# Altium PCB UI_PCB.PcbDoc
Units mm, origin at the board's own origin, x right, y up, seen from the top; angles counter-clockwise.
Board outline 93.68 x 79.71 mm, 4 copper layers (Top Layer, GND, PWR, Bottom Layer), stack 1.586 mm thick; 24 components, 36 nets, 164 pads, 236 vias.
Unrouted connection lines stored in the file: 28.
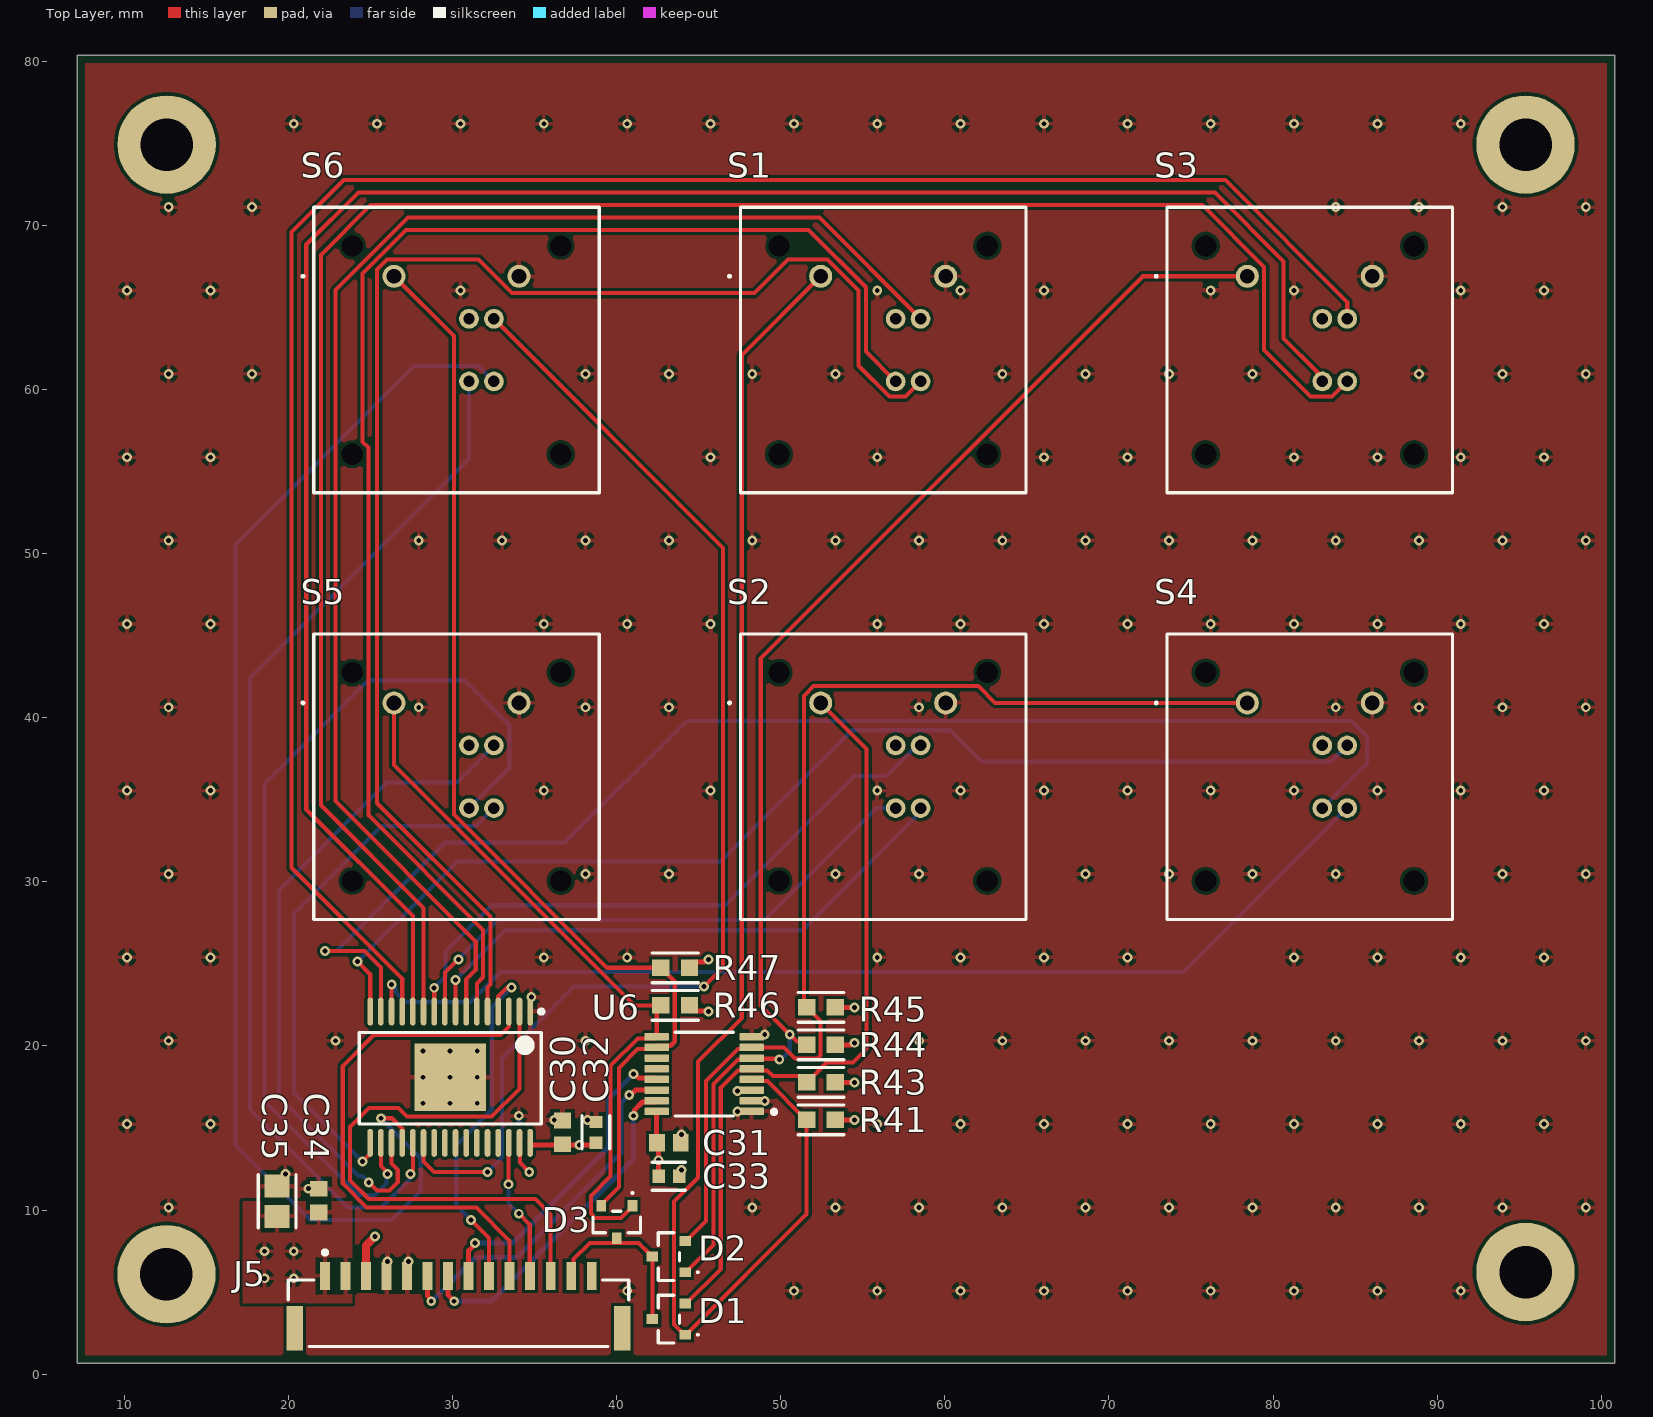
[diagram p0: Top Layer view]
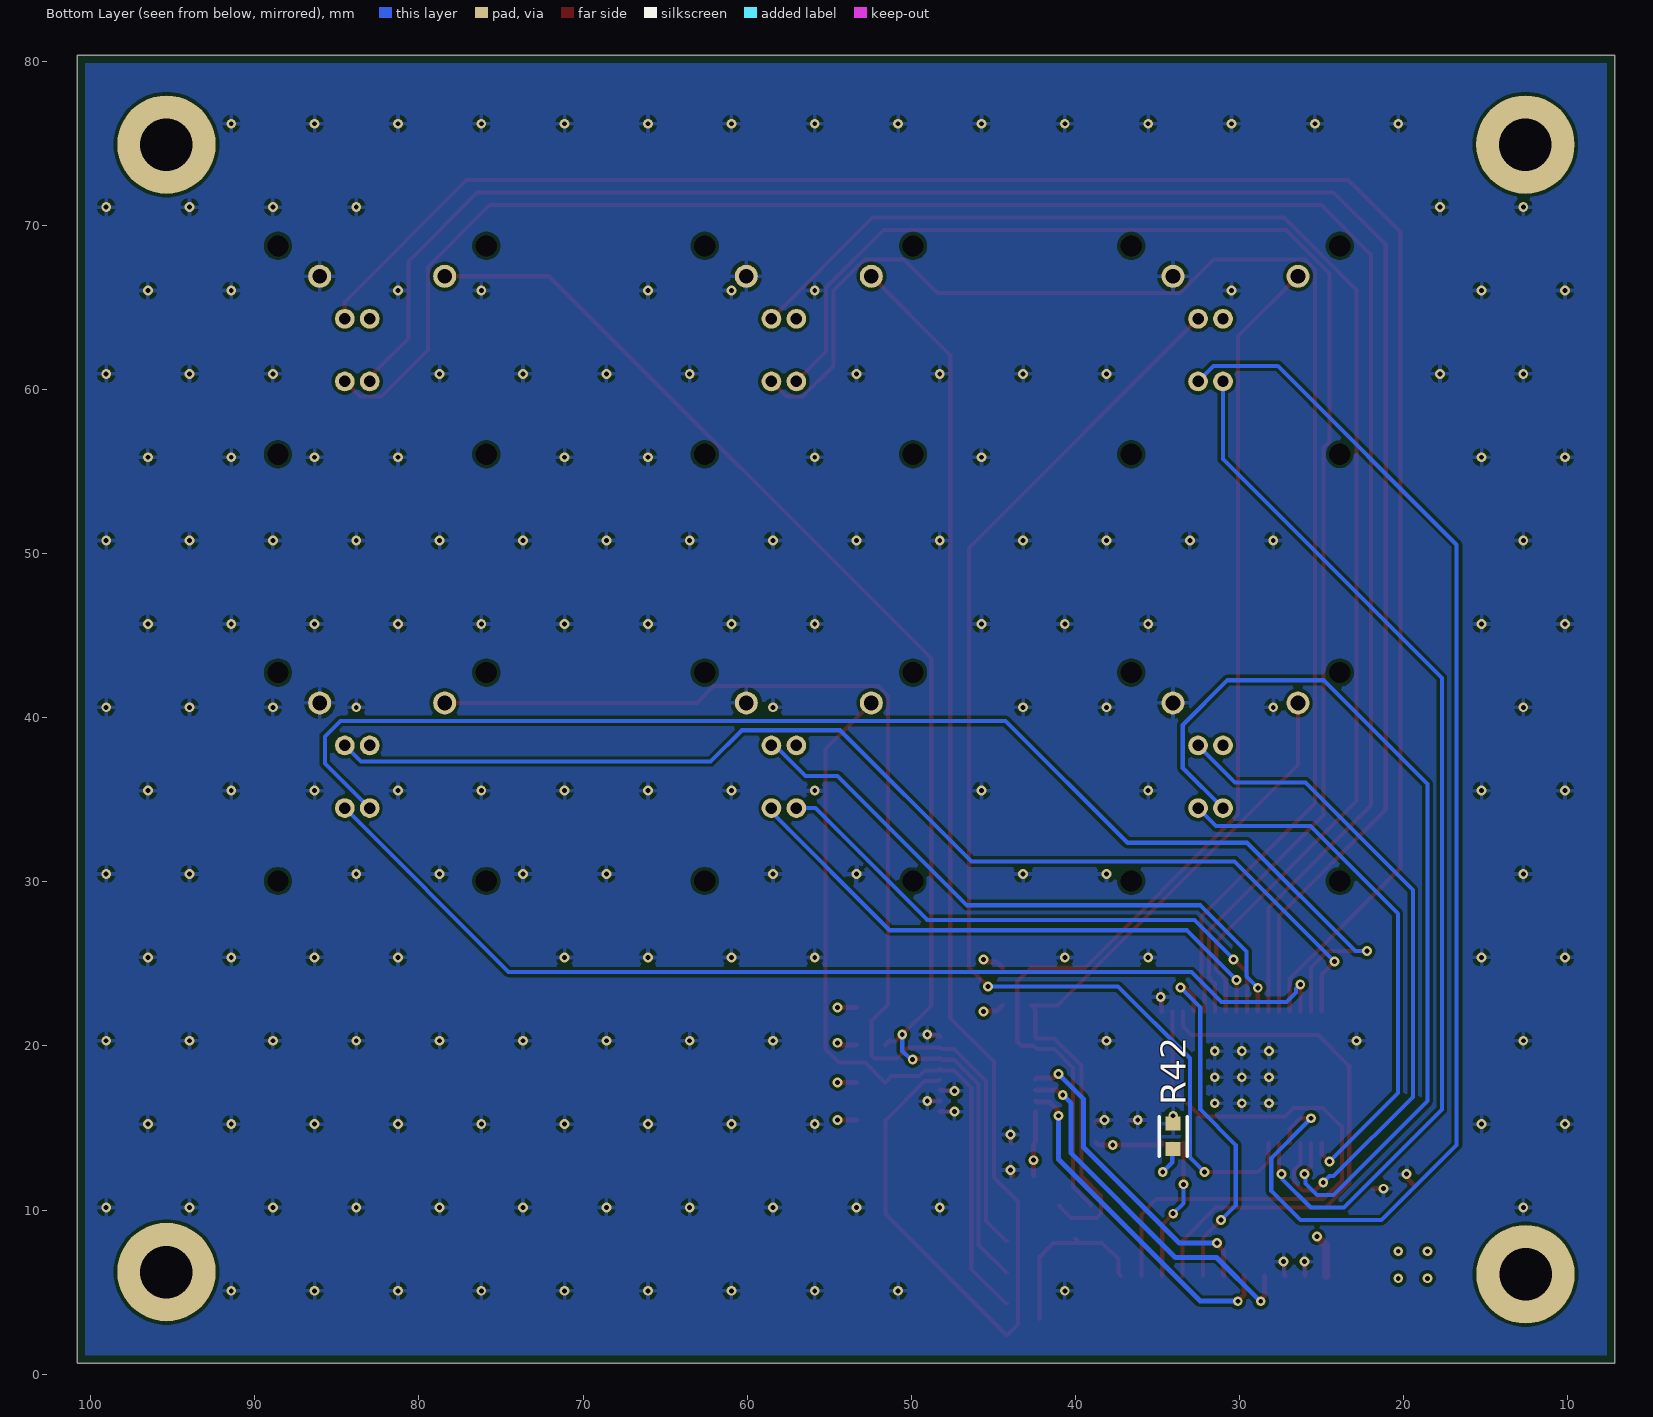
[diagram p1: Bottom Layer view, seen from below]
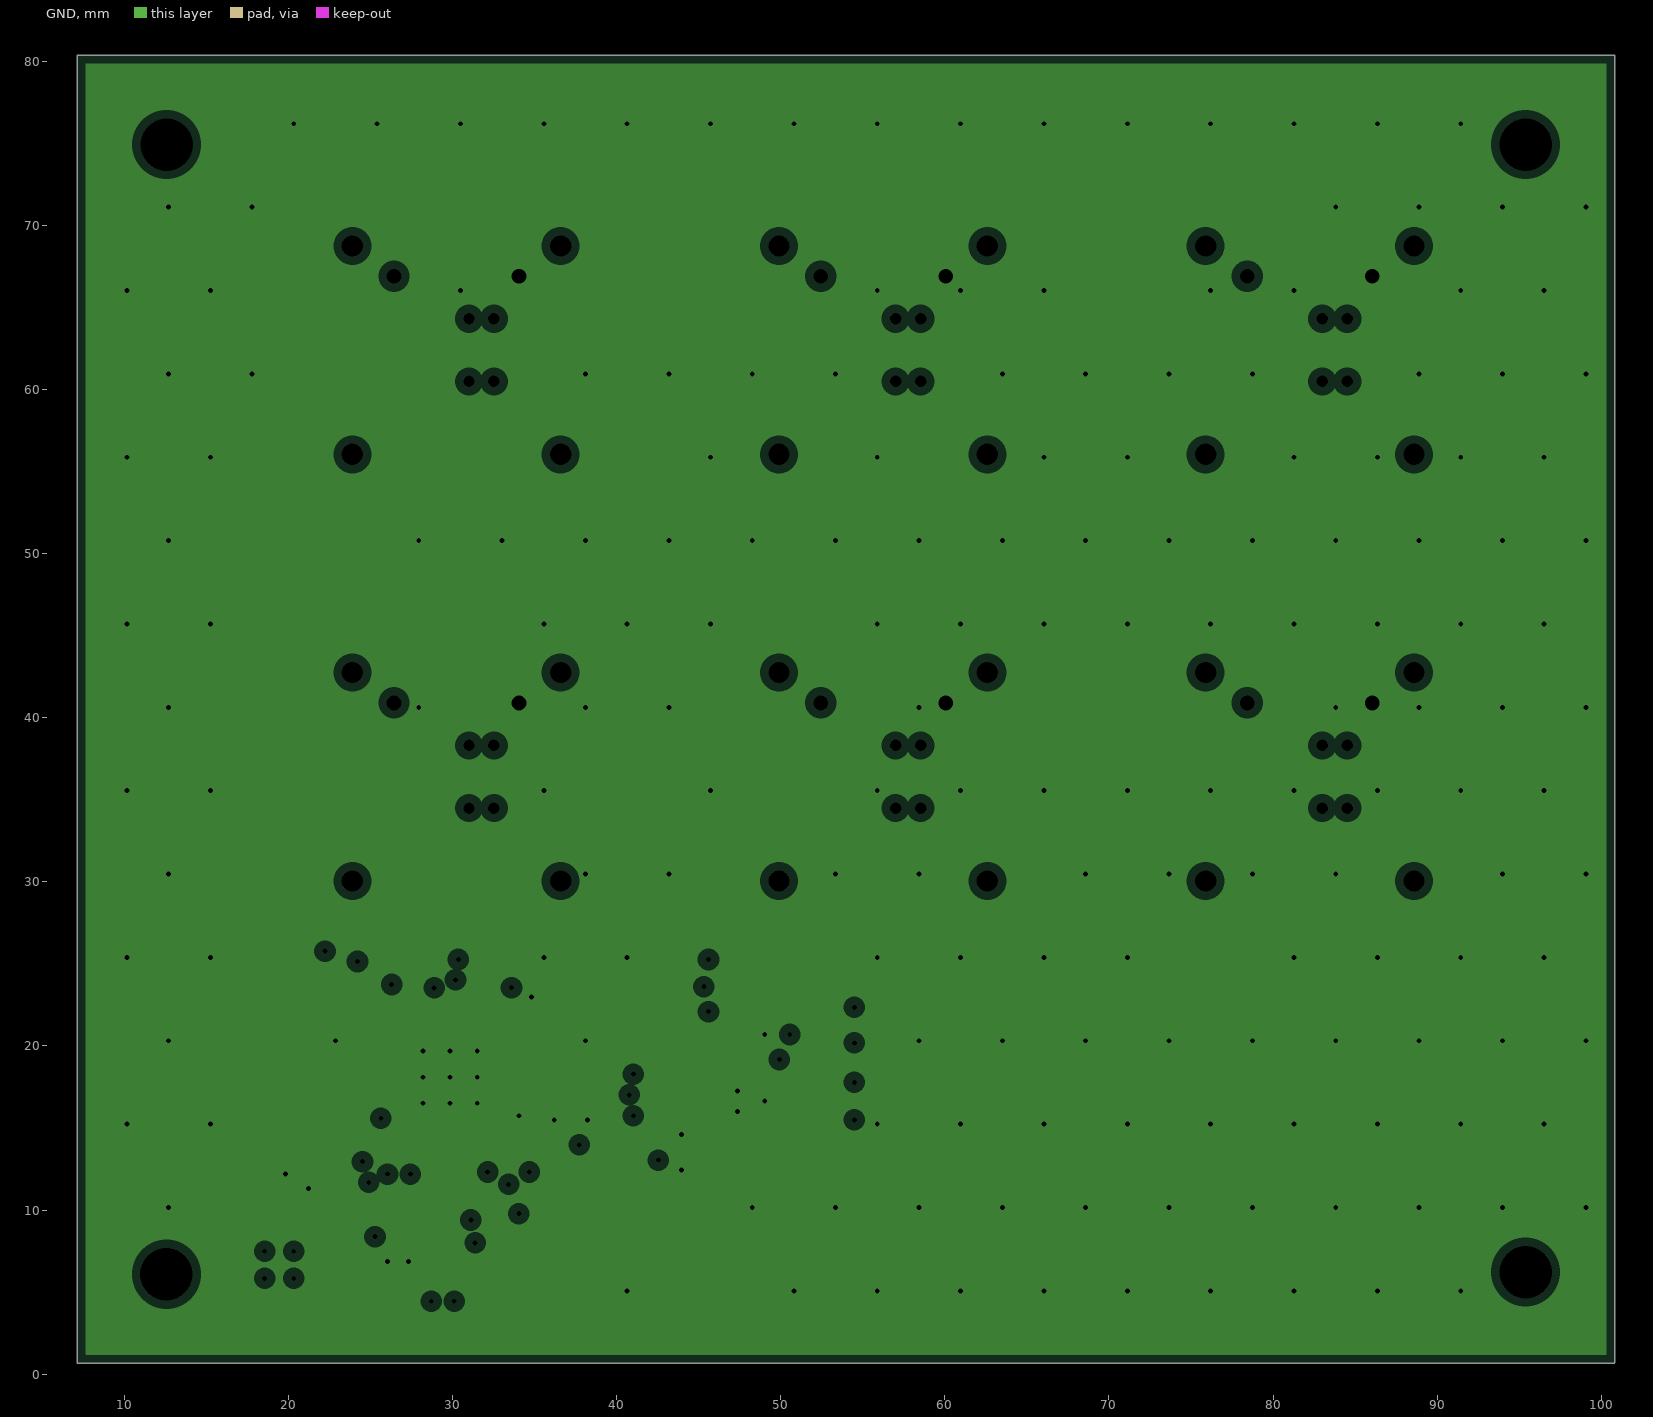
[diagram p2: GND, clearances drawn from the general rule]
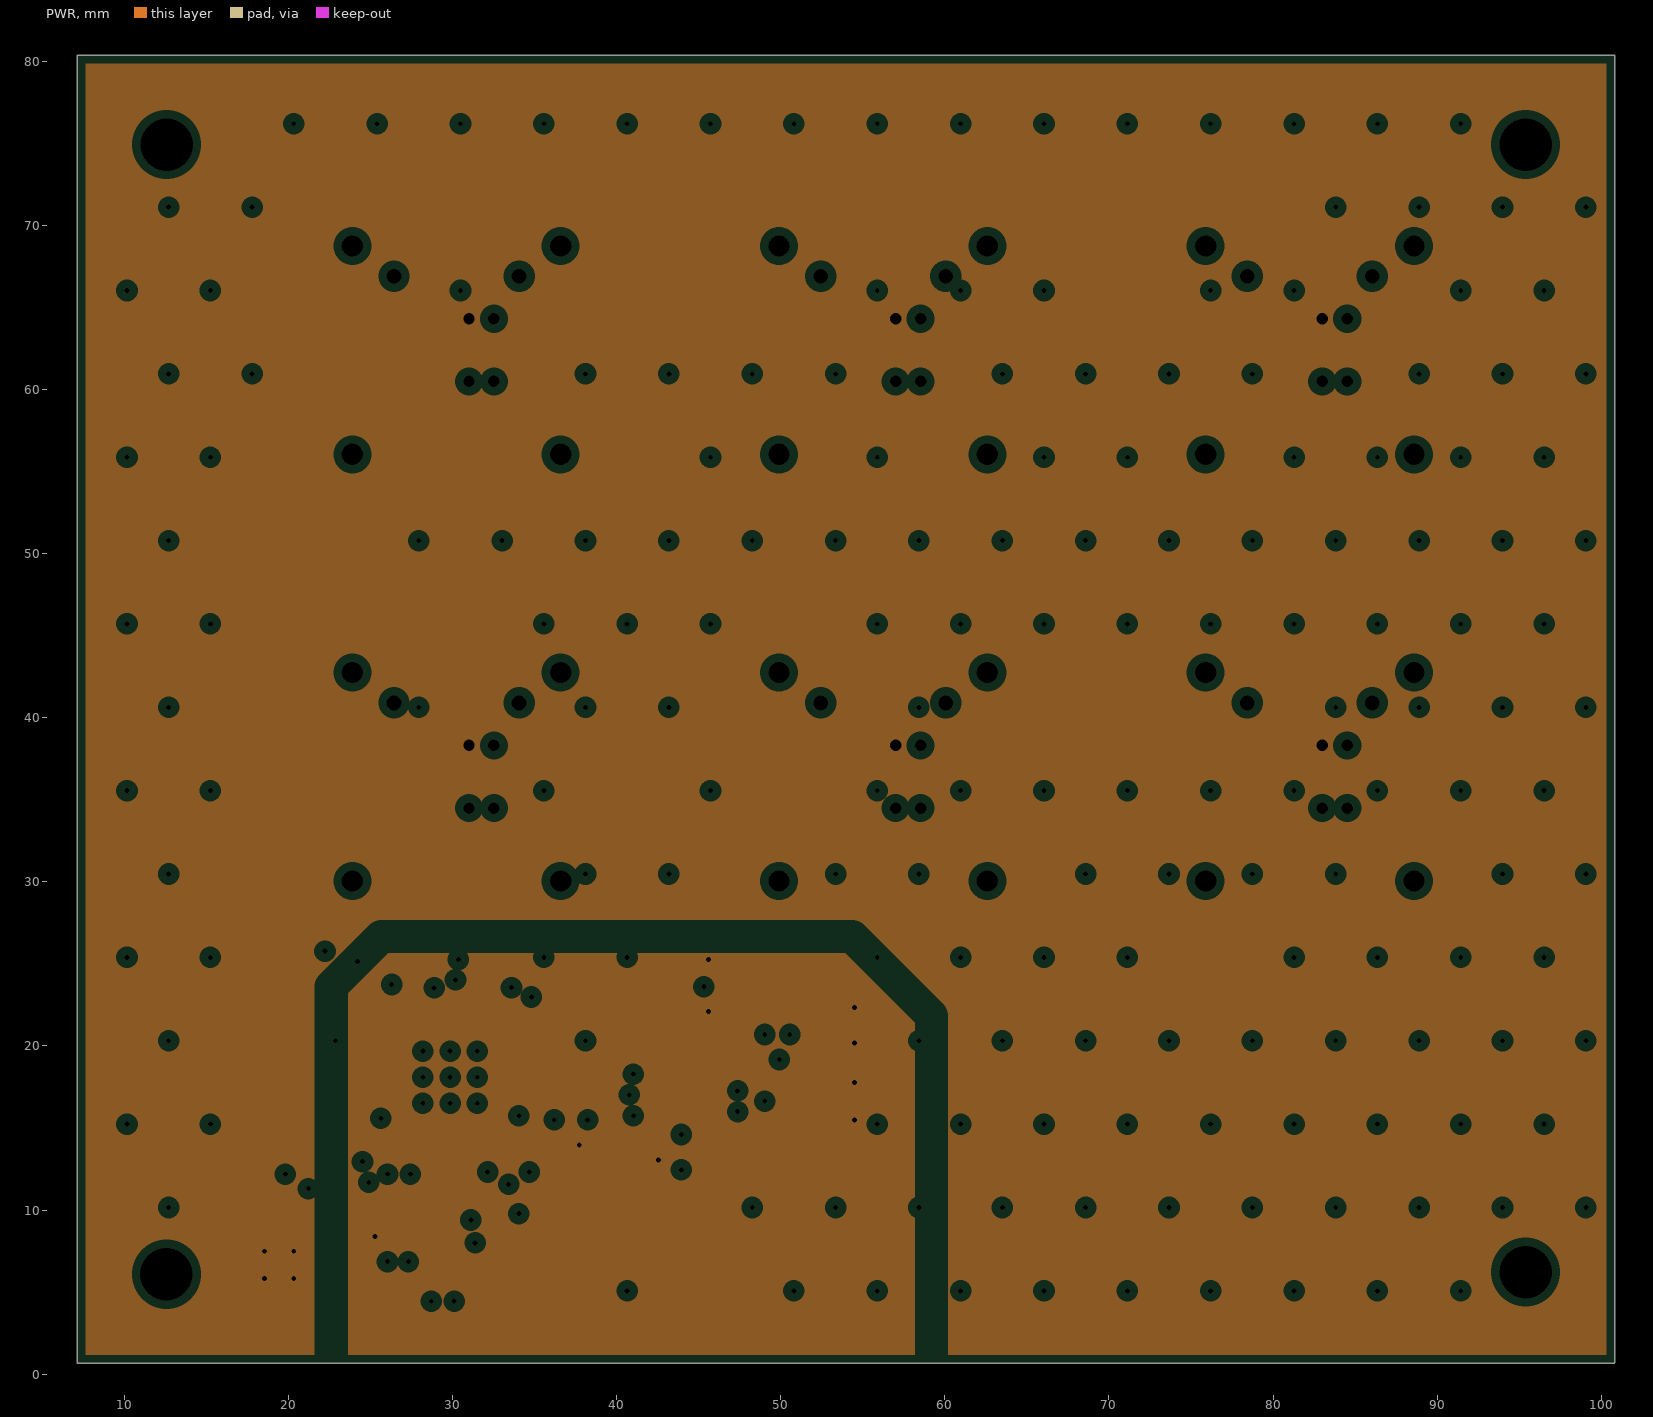
[diagram p3: PWR, clearances drawn from the general rule]
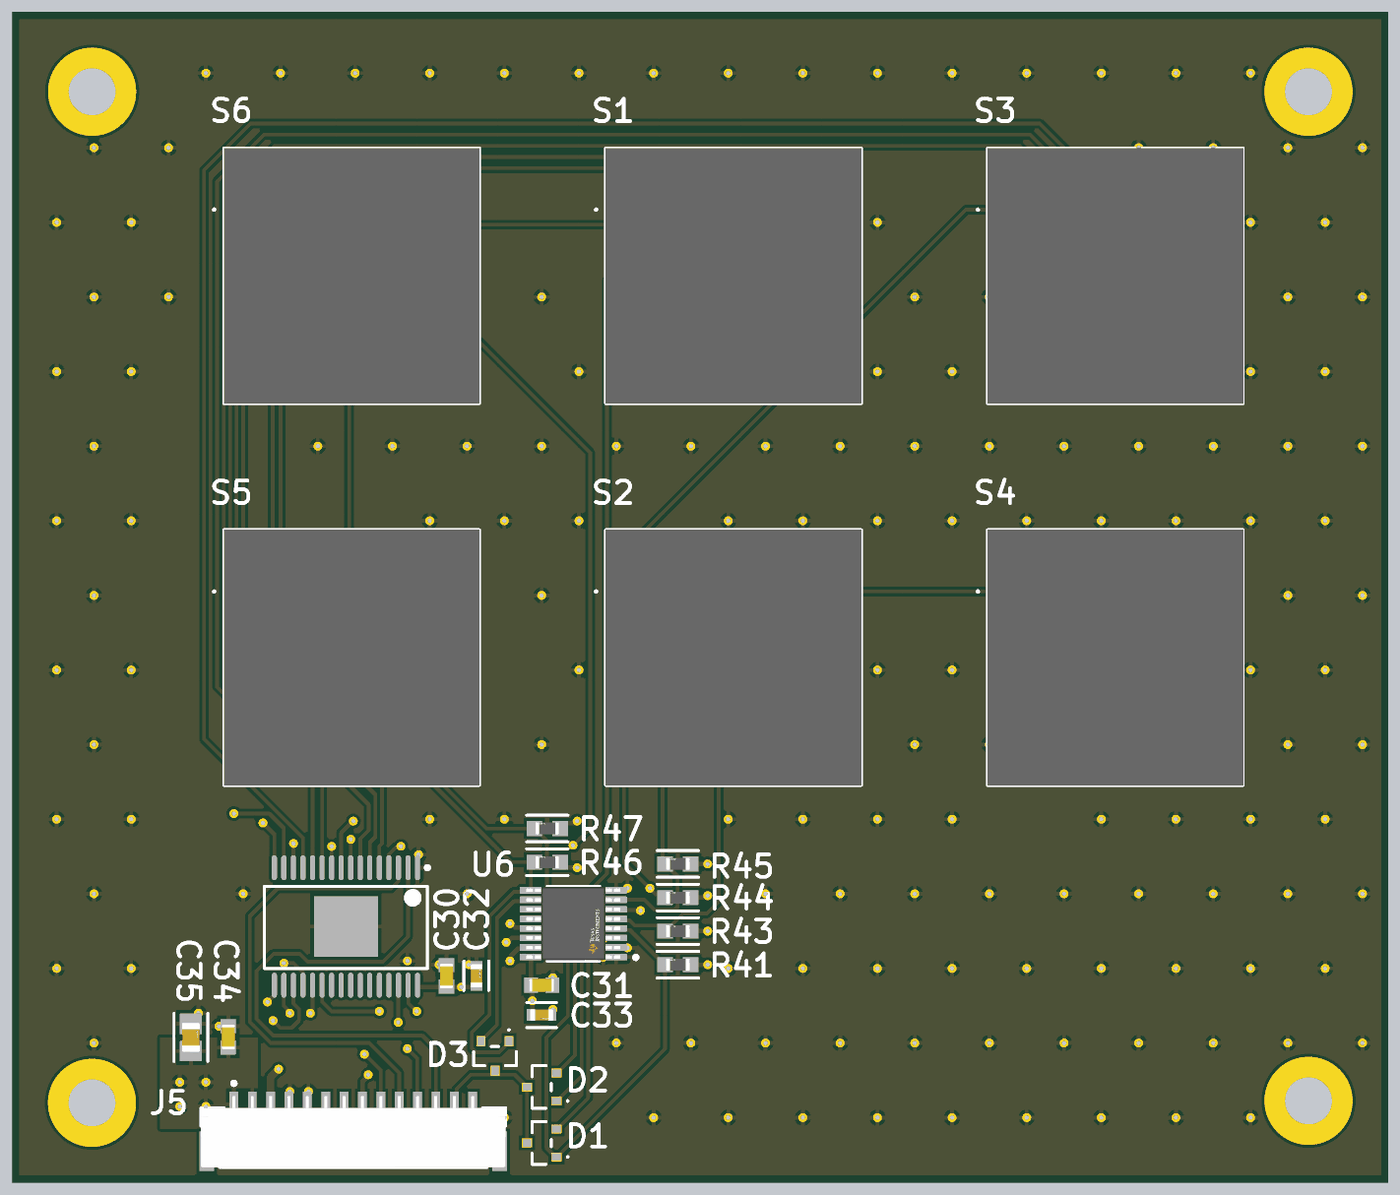
[diagram p4: 3D render of the assembled board from above, using the file's embedded part models]

## Layer stack, top to bottom
Top Solder: solder mask 0.0254, Solder Resist, Dk 4
Top Layer: signal copper 0.035
Dielectric 2: prepreg 0.2104, PP-006, Dk 4.3
GND: plane copper 0.0152, net GND
Dielectric 3: core 1.065, Core-039, Dk 4.8
PWR: plane copper 0.0152, net VLED_5V
Dielectric 1: dielectric 0.2104, FR-4, Dk 4.3
Bottom Layer: signal copper 0.035
Bottom Solder: solder mask 0.0254, Solder Resist, Dk 4

## Board outline
7.135,0.658 7.135,80.368 100.815,80.368 100.815,0.684 100.789,0.658

## Design rules (kind name [scope] priority, off if disabled: settings)
Clearance [All] p1: gap=0.2 ignorepadtopadclearanceinfootprint=FALSE
HoleSize [All] p1: absolutevalues=TRUE maxlimit=10 minlimit=0.025 maxpercent=80.000 minpercent=20.000
MinimumSolderMaskSliver [All] p1: minsoldermaskwidth=0.1
PlaneClearance [All] p1: clearance=0.508
PlaneConnect [All] p1: planeconnectstyle=Relief reliefexpansion=0.508 reliefentries=4 reliefconductorwidth=0.254 reliefairgap=0.254
PolygonConnect [All] p1: connectstyle=Relief reliefconductorwidth=0.254 reliefentries=4 polygonreliefangle="90 Angle" airgapwidth=0.254
RoutingVias [All] p1: holewidth=0.3 width=0.6 viastyle="Through Hole" minholewidth=0.3 minwidth=0.6 maxholewidth=0.3 maxwidth=0.6
SilkToSilkClearance [All] p1: silktosilkclearance=0.15
SilkToSolderMaskClearance [IsPad] p1: minsilkscreentomaskgap=0.15 clearancetoexposedcopper=TRUE
SolderMaskExpansion [All] p1: expansion=0 istentingtop=FALSE
SupplyNets "Schematic Supply Nets" [InNet('GND')] p1: voltage=0.000
Width Width_2 [InNet('VLED_5V')] p1: maxlimit=0.8 minlimit=0.5 preferedwidth=0.7
Width Width_1 [InNet('SYS_3V3')] p2: maxlimit=0.5 minlimit=0.3 preferedwidth=0.4
Width [All] p3: maxlimit=0.3 minlimit=0.2 preferedwidth=0.25 minimp=50.000000 maximp=50.000000 favimp=50.000000
24 further rules are at their usual default settings.

## Components (designator, comment, footprint, x,y, rotation, side; value= is the part's Value field where it differs from the comment)
C30 "100nF" CAPC1608X90X35ML10T15 36.703,14.732 r270 top
C31 "100nF" CAPC1608X90X35ML10T15 43.18,14.097 r180 top
C32 "1uF" FP-GRT188-0_1-e0_2_0_5-IPC_C 38.735,14.74 r90 top
C33 "1uF" FP-GRT188-0_1-e0_2_0_5-IPC_C 43.18,12.065 r0 top
C34 "100nF" CAPC1608X90X35ML10T15 21.845,10.578 r270 top
C35 "10uF" FP-GRM21B-0_15-IPC_A 19.304,10.541 r90 top
D1 "BAT54A" NXP-SOT23-3_V 43.18,3.353 r270 top
D2 "BAT54A" NXP-SOT23-3_V 43.18,7.163 r270 top
D3 "BAT54A" NXP-SOT23-3_V 40.005,9.271 r0 top
J5 "SM14B-GHS-TB(LF)(SN)" FP-SM14B-GHS-TB_LF_SN-MFG 30.353,3.714 r0 top
R41 "10kR" FP-AC0603-IPC_A 52.451,15.494 r180 top
R42 "5.1kR" FP-AT0603-IPC_B 34.036,14.493 r270 bottom
R43 "10kR" FP-AC0603-IPC_A 52.451,17.78 r180 top
R44 "10kR" FP-AC0603-IPC_A 52.451,20.066 r180 top
R45 "10kR" FP-AC0603-IPC_A 52.451,22.352 r180 top
R46 "10kR" FP-AC0603-IPC_A 43.561,22.479 r180 top
R47 "10kR" FP-AC0603-IPC_A 43.561,24.765 r180 top
S1 "KP0115ANBKG03RGBP-3SJB" KP0115ANBKG03RGBP3SJB 52.43,66.907 r0 top locked
S2 "KP0115ANBKG03RGBP-3SJB" KP0115ANBKG03RGBP3SJB 52.43,40.907 r0 top locked
S3 "KP0115ANBKG03RGBP-3SJB" KP0115ANBKG03RGBP3SJB 78.43,66.907 r0 top locked
S4 "KP0115ANBKG03RGBP-3SJB" KP0115ANBKG03RGBP3SJB 78.43,40.907 r0 top locked
S5 "KP0115ANBKG03RGBP-3SJB" KP0115ANBKG03RGBP3SJB 26.43,40.907 r0 top locked
S6 "KP0115ANBKG03RGBP-3SJB" KP0115ANBKG03RGBP3SJB 26.43,66.907 r0 top locked
U6 "TCA9534APWR" FP-PW0016A-MFG 45.339,18.288 r180 top

## Footprints (in the part's own frame and the unit in brackets; to place one, negate y for a bottom-side part, rotate by r counter-clockwise, add the part's x,y. Pads: shape width x height; smd on the part's side, far side on the other; paste and mask are expansions set on the pad)
CAPC1608X90X35ML10T15 [mm] "Chip Capacitor, 2-Leads, Body 1.7x0.9mm, IPC Low Density"
  rect 0.95x1.05 smd: 1(-0.725,0) 2(0.725,0)
  body extent -0.85,-0.45 0.85,0.45, height 0.9
FP-AC0603-IPC_A [mm]
  rect 1.059x1.012 smd paste+0 mask+0: 1(-0.877,0) 2(0.877,0)
  silkscreen extent -1.41,-0.91 1.41,0.91, body extent -1.91,-1.01 1.91,1.01, height 0.25
FP-AT0603-IPC_B [mm]
  rect 0.859x0.912 smd paste+0 mask+0: 1(-0.777,0) 2(0.777,0)
  silkscreen extent -1.21,-0.86 1.21,0.86, body extent -0.8,-0.4 0.8,0.4, height 0.55
FP-GRM21B-0_15-IPC_A [mm]
  rect 1.406x1.508 smd paste+0 mask+0: 1(-0.926,0) 2(0.926,0)
  silkscreen extent -1.63,-1.15 1.63,1.15, body extent -2.13,-1.25 2.13,1.25, height 0.25
FP-GRT188-0_1-e0_2_0_5-IPC_C [mm]
  rect 0.759x0.812 smd paste+0 mask+0: 1(-0.627,0) 2(0.627,0)
  silkscreen extent -1.01,-0.85 1.01,0.85, body extent -1.11,-0.55 1.11,0.55, height 0.25
FP-PW0016A-MFG [mm]
  rrect22% 1.5x0.45 smd paste+0 mask+0: 1(-2.9,2.275) 2(-2.9,1.625) 3(-2.9,0.975) 4(-2.9,0.325) 5(-2.9,-0.325) 6(-2.9,-0.975) 7(-2.9,-1.625) 8(-2.9,-2.275) 9(2.9,-2.275) 10(2.9,-1.625) 11(2.9,-0.975) 12(2.9,-0.325) 13(2.9,0.325) 14(2.9,0.975) 15(2.9,1.625) 16(2.9,2.275)
  silkscreen extent -4.38,-2.55 1.78,2.55, body extent -3.75,-2.8 3.75,2.8, height 0.25
FP-SM14B-GHS-TB_LF_SN-MFG [mm]
  rect 0.6x1.7 smd paste+0 mask+0: 1(-8.125,2.275) 2(-6.875,2.275) 3(-5.625,2.275) 4(-4.375,2.275) 5(-3.125,2.275) 6(-1.875,2.275) 7(-0.625,2.275) 8(0.625,2.275) 9(1.875,2.275) 10(3.125,2.275) 11(4.375,2.275) 12(5.625,2.275) 13(6.875,2.275) 14(8.125,2.275)
  rect 1x2.7 smd paste+0 mask+0: 15(-9.975,-0.925) 16(9.975,-0.925)
  silkscreen extent -10.37,-2.02 10.37,3.82, body extent -10.58,-2.37 10.58,3.22, height 0.25
KP0115ANBKG03RGBP3SJB [mm]
  round 1.4 hole 0.9: 1(0,0) A1(7.62,0)
  round 1.2 hole 0.7: 2(4.57,-2.59) 3(6.09,-2.59) 4(6.09,-6.41) 5(4.57,-6.41)
  round 0.65 hole 1.3 unplated: MH1(-2.54,-10.85) MH2(-2.54,1.85) MH3(10.16,1.85) MH4(10.16,-10.85)
  silkscreen extent -5.6,-13.2 12.51,4.2, body extent -4.89,-13.2 12.51,4.2, height 23.1
NXP-SOT23-3_V [mm] "SOT23, 3-Leads, Body 1.3x2.9mm, Pitch 0.95mm"
  rect 0.6x0.7 smd paste-0.05: 1(0.95,1) 2(-0.95,1) 3(0,-1)
  silkscreen extent -1.45,-0.65 1.45,1.79, body extent -1.45,-0.65 1.45,0.65, height 1.1

## Part data
C30 C31 C34: library part CMP-2006-02375-5, "Chip Capacitor, 100 nF, +/- 10%, 50 V, -55 to 125 degC, 0603 (1608 Metric), RoHS, Tape and Reel", Manufacturer=Murata, Max Operating Temperature="125 degC", Min Operating Temperature="-55 degC", Package Quantity=4000, Voltage Rating="50 V", ComponentLink1Description="Manufacturer URL", ComponentLink1URL=http://www.murata.com/, ComponentLink2Description=Datasheet, ComponentLink2URL=http://psearch.en.murata.com/capacitor/product/GCM188R71H104KA57%23.pdf, DatasheetVersion=07/2016, Height="0.8 mm", Length="1.6 mm", Mount="Surface Mount", Mounting Technology="Surface Mount", PackageDescription="2-Pin Surface Mount Device, Body 1.6 x 0.8 mm", PackageReference=0603, Packaging="Tape and Reel", REACH SVHC="No SVHC", RoHSCompliant=true
C32 C33: library part CMP-06035-050353-1, "Multi-Layer Ceramic Capacitor 1uF 25V X7R ±10% 0603 Paper T/R"
C35: library part CMP-06035-013048-1, "Chip Multilayer Ceramic Capacitors for General Purpose, 0805, 10uF, X5R, 15%, 20%, 25V", Case Code (Imperial)=0805, Case Code (Metric)=2012, Dielectric=X5R, Max Operating Temperature=85°C, Min Operating Temperature=-55°C, Package Quantity=3000, Resistor Type=Ceramic, Tolerance=20%, Voltage Rating=25V, Capacitance=10uF, Case/Package=0805, Depth=1.25mm, Height=1.25mm, Lead Free="Lead Free", Length=2mm, Mount="Surface Mount", Packaging="Tape and Reel", REACH SVHC="No SVHC", Termination=SMD/SMT, Thickness=0.055inch, Voltage Rating (DC)=25V, Weight=0.000335oz, Width=0.049inch
D1 D2 D3: library part CMP-0417-00002-1, "Schottky Barrier Diode, 30 V, 2 uA, -55 to 150 degC, 3-Pin SOT23, RoHS, Tape and Reel", Manufacturer="NXP Semiconductors", Temperature Range="-55 to 150 degC", Cd (pF)=10, ComponentLink1Description="Manufacturer URL", ComponentLink1URL=http://www.nxp.com/, ComponentLink2Description=Datasheet, ComponentLink2URL=http://www.nxp.com/documents/data_sheet/BAT54_SER.pdf, DatasheetVersion="Rev. 5", IR (uA)=2, Mounting Technology="Surface Mount", PackageDescription="3-Pin Plastic Surface-mounted Package, Body 1.3 x 2.9 mm, Pitch 0.95 mm", PackageReference=SOT23-3, Packing="Tape and Reel", PartNumber=BAT54A, RoHS=TRUE, Rth(j-a) (K/W)=500, Trr (ns)=5, VF (mV)=800, VR (V)=30
J5: library part CMP-17439-000618-1, "CONN HEADER SMD R/A 14POS 1.25MM", Color=Natural, Current Rating=1A, Flammability Rating="UL94 V-0", Max Operating Temperature=85°C, Min Operating Temperature=-25°C, Package Quantity=2500, Voltage Rating=50V, Connector Type=Header, Contact Finish - Mating=TIN, Contact Material=Bronze, Contact Plating=Tin, Contact Shape=Rectangular, Contact Type="Outer Shroud Contact", Fastening Type=Ramp, Gender=Male, Housing Color=Natural, Housing Material=Nylon, Insulation Color=Natural, Insulation Material=Nylon, Lead Free="Lead Free", Mount="Surface Mount", Number Of Contacts=14, Number of Positions=14, Number of Rows=1, Packaging="Cut Tape", Pitch=1.25mm, Reach SVHC Compliant=Yes, Series=GH, Termination=Solder, Voltage Rating (AC)=50V, Wire/Cable Gauge=26AWG
R41 R43 R44 R45 R46 R47: library part CMP-03412-040683-1, "RES 10kΩ 5.00% 0.2W 0603"
R42: library part CMP-03412-047308-1, "Thin Film Chip Resistors Automotive Grade 5.1kΩ 1% 50ppm/°C 0603"
S1 S2 S3 S4 S5 S6: "Switch", Manufacturer_Name="NKK Switches", Mouser Part Number=633-5ANBKG03RGBP3SJB, Datasheet Link=https://www.nkkswitches.com/wp-content/themes/impress-blank/search/inc/parts.php?part_no=KP0115ANBKG03RGBP-3FJB, Height=23mm, Manufacturer_Part_Number=KP0115ANBKG03RGBP-3SJB, Mouser Price/Stock=https://www.mouser.co.uk/ProductDetail/NKK-Switches/KP0115ANBKG03RGBP-3SJB?qs=u16ybLDytRbS46rqp2jE%2Fg%3D%3D
U6: library part CMP-04886-000001-1, "IC I/O EXPANDER I2C 8B 16TSSOP", Ambient Temperature Range High=+85°C, Ambient Temperature Range Low=-40°C, Frequency=400kHz, Manufacturer="Texas Instruments", Max Junction Temp=100°C, Max Supply Voltage=5.5V, Min Supply Voltage=1.65V, Nominal Supply Current=5-22uA, Package=PW0016A, Temperature="-40°C to +85°C", Automotive=No, Category=IC, ComponentLink2Description=Datasheet, ComponentLink2URL=http://www.ti.com/lit/ds/symlink/tca9534a.pdf, Device Class L1="Integrated Circuits (ICs)", Device Class L2="Interface ICs", Device Class L3="I/O Expanders", Digikey Description="IC I/O EXPANDER I2C 8B 16TSSOP", Height=1.2mm, Interface=I2C,SMBus, Lead Free=Yes, Manufacturer Part Number=TCA9534APWR, Number Of I/Os=8, Octopart=https://octopart.com/tca9534apwr-texas+instruments-50333529, RoHS=TRUE, Standoff Height=0.05mm, Temperature Range High=+85°C, Temperature Range Low=-40°C

## Free pads (board coordinates)
  oval 0.35x1.7 smd: 1(34.73,22.097) 2(34.08,22.097) 3(33.43,22.097) 4(32.78,22.097) 5(32.13,22.097) 6(31.48,22.097) 7(30.83,22.097) 8(30.18,22.097) 9(29.53,22.097) 10(28.88,22.097) 11(28.23,22.097) 12(27.58,22.097) 13(26.93,22.097) 14(26.28,22.097) 15(25.63,22.097) 16(24.98,22.097) 17(24.98,14.097) 18(25.63,14.097) 19(26.28,14.097) 20(26.93,14.097) 21(27.58,14.097) 22(28.23,14.097) 23(28.88,14.097) 24(29.53,14.097) 25(30.18,14.097) 26(30.83,14.097) 27(31.48,14.097) 28(32.13,14.097) 29(32.78,14.097) 30(33.43,14.097) 31(34.08,14.097) 32(34.73,14.097)
  rect 4.36x4.11 smd: 33(29.855,18.097)
  round 6 hole 3.2 unplated: MH3(12.565,6.088) MH3(12.573,74.933) MH3(95.385,6.223) MH3(95.385,74.933)

## Via types
v1: diameter 0.6, hole 0.3, Top Layer to Bottom Layer, 236 vias

## Nets (pads, with @x,y where several pads share a name; then routed paths per layer and width w, separated by ;. In a path a pad name is that pad's centre, name@x,y a point inside that pad or via, vN(x,y) a via of type N, cw(c..) or ccw(c..) an arc to the next point about the centre after c; other vN are vias at no path point)
BTN_INOUT: D3.2 R47.2 S6.1 U6.10 | length 68.6
  Top Layer w0.25: S6.1 30.075,63.262 30.075,34.114 39.424,24.765 R47.2 42.708,24.765 43.539,23.934 43.539,20.257 43.295,20.013 42.539,20.013 U6.10 42.339,19.813 41.276,19.813 40.132,18.669 40.132,11.398 39.055,10.321 D3.2
BTN_MULTI_WAKE: D1.3 D2.3 D3.3 J5.13 | length 10.8
  Top Layer w0.25: J5.13 37.38,6.141 37.38,7.018 38.363,8.001 D3.3@39.878,8.001 ; 42.18,6.198 D2.3
  Top Layer w0.254: D3.3 39.878,8.144 39.878,8.001 40.005,8.001 41.342,8.001 41.957,7.386 41.957,7.336 42.13,7.163 D2.3 ; D1.3 42.18,6.198
BTN_SHARED: D3.1 R46.2 S5.1 U6.9 | length 44.1
  Top Layer w0.25: S5.1 26.43,37.122 41.073,22.479 R46.2 42.439,22.234 U6.9 42.339,20.463 41.29,20.463 39.624,18.797 39.624,12.065 38.43,10.871 38.43,9.786 38.691,9.525 40.259,9.525 40.955,10.221 D3.1
BTN_U1: D1.1 R41.2 S1.1 U6.4 | length 89.1
  Top Layer w0.25: U6.4 48.339,17.863 49.182,17.863 51.551,15.494 R41.2 51.574,9.747 44.23,2.403 D1.1 44.13,2.403 43.505,3.028 43.505,10.518 44.958,11.971 44.958,19.05 47.625,21.717 47.625,62.102 S1.1
BTN_U2: D1.2 R43.2 S2.1 U6.5 | length 46.9
  Top Layer w0.25: D1.2 44.23,4.303 46.344,6.417 46.344,17.474 47.383,18.513 48.139,18.513 U6.5 48.339,18.513 49.01,18.513 49.168,18.513 49.52,18.161 51.193,18.161 R43.2 51.598,17.78 52.802,18.984 54.412,18.984 55.235,19.807 55.235,38.102 S2.1
BTN_U3: D2.1 R44.2 S3.1 U6.6 | length 82.8
  Top Layer w0.25: D2.1 44.23,6.213 45.894,7.877 45.894,17.674 47.383,19.163 48.139,19.163 U6.6 48.282,19.22 49.868,19.22 v1(49.911,19.177) ; 50.979,20.268 v1(50.546,20.701) 48.778,22.469 48.778,43.623 72.061,66.907 S3.1
  Top Layer w0.3: R44.2@51.226,20.308 51.332,20.308 R44.2
  Bottom Layer w0.25: v1(49.911,19.177) 50.006,19.177 50.337,19.508 50.369,19.508 50.546,19.685 v1(50.546,20.701)
BTN_U4: D2.2 R45.2 S4.1 U6.7 | length 68.5
  Top Layer w0.25: D2.2 44.23,8.113 45.444,9.327 45.444,17.874 47.383,19.813 48.139,19.813 U6.7 50.191,19.913 50.869,19.235 52.238,19.235 52.429,19.425 52.429,21.521 51.598,22.352 R45.2 51.405,22.521 51.405,41.332 52.005,41.932 62.036,41.932 63.061,40.907 S4.1
GND: C30.1 C31.1 C32.2 C33.2 C34.1 C35.2 J5.4 J5.5 pad.1 pad.33 R42.1 S1.A1 S2.A1 S3.A1 S4.A1 S5.A1 S6.A1 U6.1 U6.2 U6.3 U6.8 | length 10.2
  Top Layer w0.3: C35.2 19.812,11.975 v1(19.812,12.192) ; v1(21.209,11.303) C34.1 ; J5.4@26.007,6.018 26.007,6.83 v1(26.035,6.858) ; J5.5 27.266,6.028 27.266,6.819 v1(27.305,6.858) ; pad.1 34.739,22.107 34.739,22.847 34.798,22.906 v1(34.798,22.987) ; v1(36.195,15.494) 36.232,15.457 C30.1 ; v1(38.227,15.494) 38.284,15.437 38.665,15.437 C32.2 ; C33.2 43.942,12.2 v1(43.942,12.446) ; C31.1 43.942,14.134 v1(43.942,14.605) ; v1(47.369,17.265) 47.393,17.289 48.215,17.289 U6.3 ; v1(47.371,16.002) 47.377,16.008 48.234,16.008 U6.1 ; U6.2 48.252,16.65 49.009,16.65 v1(49.022,16.637) ; U6.8 48.314,20.638 48.878,20.638 48.941,20.701 v1(49.022,20.701)
  Bottom Layer w0.3: R42.1 v1(34.036,15.748)
  other v1: 40.64,5.08 50.8,5.08 55.88,5.08 60.96,5.08 66.04,5.08 71.12,5.08 76.2,5.08 81.28,5.08 86.36,5.08 91.44,5.08 12.7,10.16 48.26,10.16 53.34,10.16 58.42,10.16 63.5,10.16 68.58,10.16 73.66,10.16 78.74,10.16 83.82,10.16 88.9,10.16 93.98,10.16 99.06,10.16 10.16,15.24 15.24,15.24 55.88,15.24 60.96,15.24 66.04,15.24 71.12,15.24 76.2,15.24 81.28,15.24 86.36,15.24 91.44,15.24 96.52,15.24 28.194,16.51 29.855,16.51 31.505,16.51 28.194,18.097 29.855,18.097 31.505,18.097 28.194,19.685 29.855,19.685 31.505,19.685 12.7,20.32 22.86,20.32 38.1,20.32 58.42,20.32 63.5,20.32 68.58,20.32 73.66,20.32 78.74,20.32 83.82,20.32 88.9,20.32 93.98,20.32 99.06,20.32 10.16,25.4 15.24,25.4 35.56,25.4 40.64,25.4 55.88,25.4 60.96,25.4 66.04,25.4 71.12,25.4 81.28,25.4 86.36,25.4 91.44,25.4 96.52,25.4 12.7,30.48 38.1,30.48 43.18,30.48 53.34,30.48 58.42,30.48 68.58,30.48 73.66,30.48 78.74,30.48 83.82,30.48 93.98,30.48 99.06,30.48 10.16,35.56 15.24,35.56 35.56,35.56 45.72,35.56 55.88,35.56 60.96,35.56 66.04,35.56 71.12,35.56 76.2,35.56 81.28,35.56 86.36,35.56 91.44,35.56 96.52,35.56 12.7,40.64 27.94,40.64 38.1,40.64 43.18,40.64 58.42,40.64 83.82,40.64 88.9,40.64 93.98,40.64 99.06,40.64 10.16,45.72 15.24,45.72 35.56,45.72 40.64,45.72 45.72,45.72 55.88,45.72 60.96,45.72 66.04,45.72 71.12,45.72 76.2,45.72 81.28,45.72 86.36,45.72 91.44,45.72 96.52,45.72 12.7,50.8 27.94,50.8 33.02,50.8 38.1,50.8 43.18,50.8 48.26,50.8 53.34,50.8 58.42,50.8 63.5,50.8 68.58,50.8 73.66,50.8 78.74,50.8 83.82,50.8 88.9,50.8 93.98,50.8 99.06,50.8 10.16,55.88 15.24,55.88 45.72,55.88 55.88,55.88 66.04,55.88 71.12,55.88 81.28,55.88 86.36,55.88 91.44,55.88 96.52,55.88 12.7,60.96 17.78,60.96 38.1,60.96 43.18,60.96 48.26,60.96 53.34,60.96 63.5,60.96 68.58,60.96 73.66,60.96 78.74,60.96 88.9,60.96 93.98,60.96 99.06,60.96 10.16,66.04 15.24,66.04 30.48,66.04 55.88,66.04 60.96,66.04 66.04,66.04 76.2,66.04 81.28,66.04 91.44,66.04 96.52,66.04 12.7,71.12 17.78,71.12 83.82,71.12 88.9,71.12 93.98,71.12 99.06,71.12 20.32,76.2 25.4,76.2 30.48,76.2 35.56,76.2 40.64,76.2 45.72,76.2 50.8,76.2 55.88,76.2 60.96,76.2 66.04,76.2 71.12,76.2 76.2,76.2 81.28,76.2 86.36,76.2 91.44,76.2
HMI_INT: J5.8 U6.13 | length 19.4
  Top Layer w0.3: J5.8 30.978,7.529 31.369,7.92 v1(31.369,8.001) ; v1(41.021,18.288) 41.102,18.288 41.352,18.038 42.364,18.038 U6.13
  Bottom Layer w0.3: v1(31.369,8.001) 33.685,8.001 39.497,13.813 39.497,16.764 v1(41.021,18.288)
I2C_SCL: J5.6 U6.14 | length 22.5
  Top Layer w0.3: J5.6 28.478,4.75 28.702,4.526 v1(28.702,4.445) ; v1(40.767,17.018) 40.848,17.018 41.143,17.313 U6.14
  Bottom Layer w0.3: v1(28.702,4.445) 28.732,4.445 31.399,7.112 33.909,7.112 40.259,13.462 40.259,16.51 v1(40.767,17.018)
I2C_SDA: J5.7 U6.15 | length 20.8
  Top Layer w0.3: J5.7 29.728,4.816 v1(30.099,4.445) ; v1(41.021,15.748) 41.078,15.805 41.078,16.093 41.573,16.588 42.364,16.588 U6.15
  Bottom Layer w0.3: v1(30.099,4.445) 30.112,4.458 32.398,4.458 41.021,13.081 v1(41.021,15.748)
LED_BLANK_HMI: J5.12 pad.2 | length 36.5
  Top Layer w0.25: pad.2 34.08,17.392 32.385,15.697 27.23,15.697 26.695,16.232 24.916,16.232 23.759,15.075 23.759,11.801 24.892,10.668 35.052,10.668 35.978,9.742 J5.12
LED_LAT_HMI: J5.11 pad.30 | length 8.7
  Top Layer w0.25: v1(33.415,11.571) 33.415,14.083 pad.30 ; v1(34.036,9.779) 34.699,9.116 34.699,6.018 J5.11
  Bottom Layer w0.25: v1(33.415,11.571) 33.401,11.557 33.401,10.414 v1(34.036,9.779)
LED_SCLK_HMI: J5.10 pad.3 | length 32.9
  Top Layer w0.25: pad.3 33.43,21.187 32.918,20.676 25.197,20.676 23.309,18.788 23.309,11.615 24.764,10.16 31.446,10.16 33.478,8.128 J5.10
LED_SIN_HMI: J5.9 pad.4 | length 21.7
  Top Layer w0.25: v1(31.115,9.398) 32.228,8.285 J5.9 ; pad.4 32.78,23.011 33.325,23.556 v1(33.592,23.556)
  Bottom Layer w0.25: v1(31.115,9.398) 30.226,10.287 30.226,13.97 32.385,16.129 32.385,22.348 v1(33.592,23.556)
NetR42_2: pad.31 R42.2 | length 3.7
  Top Layer w0.25: pad.31 34.099,14.078 34.099,12.891 v1(34.671,12.319)
  Bottom Layer w0.25: R42.2 34.093,13.659 34.093,12.897 v1(34.671,12.319)
SW1B: pad.7 S1.3 | length 87.8
  Top Layer w0.25: pad.7 30.83,24.058 31.41,24.638 31.41,26.375 22.86,34.925 22.86,66.059 27.286,70.485 52.352,70.485 S1.3
SW1G: pad.6 S1.5 | length 87.9
  Top Layer w0.25: pad.6 31.48,23.808 31.86,24.188 31.86,27.068 24.865,34.063 24.865,56.461 24.511,56.815 24.511,67.074 27.169,69.732 51.691,69.732 55.186,66.237 55.186,62.311 S1.5
SW1R: pad.5 S1.4 | length 89.8
  Top Layer w0.25: pad.5 32.13,23.558 32.31,23.738 32.31,27.888 25.405,34.793 25.405,67.332 26.005,67.932 31.575,67.932 33.625,65.882 48.394,65.882 50.444,67.932 52.855,67.932 54.736,66.051 54.736,61.453 56.617,59.572 57.595,59.572 S1.4
SW2B: pad.10 S2.3 | length 38.1
  Top Layer w0.25: pad.10 v1(28.88,23.546)
  Bottom Layer w0.25: v1(28.88,23.546) 29.577,24.243 29.577,25.767 32.385,28.575 46.609,28.575 54.483,36.449 56.44,36.449 58.308,38.317 S2.3
SW2G: pad.9 S2.5 | length 34
  Top Layer w0.25: pad.9 29.53,24.486 30.317,25.273 v1(30.353,25.273)
  Bottom Layer w0.25: v1(30.353,25.273) 30.353,25.309 32.73,27.686 49.022,27.686 55.833,34.497 S2.5
SW2R: pad.8 S2.4 | length 34.7
  Top Layer w0.25: pad.8 v1(30.18,24.028)
  Bottom Layer w0.25: v1(30.18,24.028) 33.202,27.051 51.308,27.051 58.52,34.263 S2.4
SW3B: pad.13 S3.3 | length 120
  Top Layer w0.25: pad.13 26.93,24.124 20.193,30.861 20.193,69.596 23.368,72.771 77.089,72.771 84.52,65.34 S3.3
SW3G: pad.12 S3.5 | length 120.3
  Top Layer w0.25: pad.12 27.58,27.919 21.082,34.417 21.082,68.834 24.257,72.009 76.454,72.009 80.645,67.818 80.645,63.119 82.694,61.07 82.694,61.06 83,60.754 S3.5
SW3R: pad.11 S3.4 | length 120.7
  Top Layer w0.25: pad.11 28.23,28.412 21.971,34.671 21.971,68.217 25.001,71.247 75.692,71.247 79.455,67.484 79.455,62.404 82.287,59.572 83.595,59.572 S3.4
SW4B: pad.16 S4.3 | length 70.7
  Top Layer w0.25: v1(24.206,25.146) 24.98,24.373 pad.16
  Bottom Layer w0.25: v1(24.206,25.146) 30.302,31.242 46.33,31.242 54.33,39.242 60.326,39.242 62.23,37.338 83.541,37.338 S4.3
SW4G: pad.15 S4.5 | length 81.7
  Top Layer w0.25: v1(22.225,25.781) 24.637,25.781 25.63,24.788 pad.15
  Bottom Layer w0.25: v1(22.225,25.781) 22.924,25.781 29.528,32.385 36.83,32.385 44.247,39.802 84.785,39.802 85.725,38.862 85.725,37.222 S4.5
SW4R: pad.14 S4.4 | length 65.4
  Top Layer w0.25: pad.14 26.28,23.74 v1(26.289,23.749)
  Bottom Layer w0.25: v1(26.289,23.749) 26.543,23.495 26.543,23.266 27.127,22.682 31.101,22.682 32.93,24.511 74.534,24.511 S4.4
SW5B: pad.19 S5.3 | length 41.7
  Top Layer w0.25: v1(24.892,11.684) 25.39,11.186 26.147,11.186 26.66,11.699 26.66,12.451 26.28,12.831 pad.19
  Bottom Layer w0.25: v1(24.892,11.684) 24.511,12.065 24.257,12.065 19.431,16.891 19.431,29.515 25.984,36.068 30.271,36.068 S5.3
SW5G: pad.18 S5.5 | length 56.8
  Top Layer w0.25: pad.18 25.628,14.096 25.628,12.693 26.035,12.287 v1(26.035,12.192)
  Bottom Layer w0.25: v1(26.035,12.192) 25.968,12.125 25.968,11.617 25.273,10.922 24.257,10.922 18.542,16.637 18.542,35.966 24.867,42.291 30.734,42.291 33.452,39.573 33.452,36.949 S5.5
SW5R: pad.17 S5.4 | length 33
  Top Layer w0.25: v1(24.511,12.954) 24.98,13.422 pad.17
  Bottom Layer w0.25: v1(24.511,12.954) 20.34,17.125 20.34,28.062 25.679,33.401 31.424,33.401 S5.4
SW6B: pad.22 S6.3 | length 73.7
  Top Layer w0.25: pad.22 28.23,12.969 28.88,12.319 v1(32.131,12.319) ; S6.3 46.482,50.355 46.482,24.79 v1(45.314,23.622)
  Bottom Layer w0.25: v1(32.131,12.319) 33.02,13.208 33.02,19.253 37.389,23.622 v1(45.314,23.622)
SW6G: pad.21 S6.5 | length 65.1
  Top Layer w0.25: v1(27.432,12.192) 27.432,12.287 27.58,12.434 pad.21
  Bottom Layer w0.25: v1(27.432,12.192) 27.365,12.125 27.365,11.871 25.654,10.16 23.622,10.16 17.653,16.129 17.653,42.418 31,55.765 S6.5
SW6R: pad.20 S6.4 | length 79
  Top Layer w0.25: v1(25.629,15.596) 26.296,15.596 26.93,14.962 pad.20
  Bottom Layer w0.25: v1(25.629,15.596) 28.057,13.167 28.057,11.166 26.289,9.398 21.336,9.398 16.764,13.97 16.764,50.546 27.661,61.443 31.574,61.443 S6.4
SYS_3V3: C30.2 C31.2 C32.1 C33.1 J5.3 pad.32 R41.1 R43.1 R44.1 R45.1 R46.1 R47.1 U6.16 | length 18.2
  Top Layer w0.3: pad.32 34.73,13.993 34.753,13.97 36.703,13.97 v1(37.719,13.97) 38.591,13.97 C32.1 ; U6.16 42.439,14.113 C31.2 42.545,14.007 v1(42.545,13.04) 42.545,12.073 C33.1 ; R46.1 44.794,22.123 45.568,22.123 v1(45.593,22.098) ; R47.1 44.794,25.121 45.36,25.121 45.512,25.273 v1(45.593,25.273) ; R41.1 v1(54.483,15.494) ; R43.1 v1(54.483,17.78) ; R44.1 54.275,20.066 54.356,20.147 54.356,20.193 v1(54.483,20.193) ; R45.1 v1(54.483,22.352)
  Top Layer w0.5: J5.3 24.728,7.837 v1(25.273,8.382)
VLED_5V: C34.2 C35.1 J5.1 J5.2 S1.2 S2.2 S3.2 S4.2 S5.2 S6.2
  other v1: 18.542,5.842 20.32,5.842 18.542,7.493 20.32,7.493
pads on no net: J5.14 J5.15 J5.16 S1.MH1 S1.MH2 S1.MH3 S1.MH4 S2.MH1 S2.MH2 S2.MH3 S2.MH4 S3.MH1 S3.MH2 S3.MH3 S3.MH4 S4.MH1 S4.MH2 S4.MH3 S4.MH4 S5.MH1 S5.MH2 S5.MH3 S5.MH4 S6.MH1 S6.MH2 S6.MH3 S6.MH4 U6.11 U6.12

## Polygon pours and split planes (outlines as drawn)
GND on Top Layer "GND_L01_P001" (solid, pour order 1): 7.62,79.883 7.62,1.143 100.33,1.143 100.33,79.883
VLED_5V on Top Layer "VLED_5V_L01_P000" (solid, pour order 0): 17.209,10.541 23.876,10.541 23.876,4.318 17.209,4.318
GND on Bottom Layer "GND_L04_P002" (solid, pour order 2): 7.62,79.883 7.62,1.143 100.33,1.143 100.33,79.883
GND on GND (split plane): 100.304,1.169 7.646,1.169 7.646,79.857 100.304,79.857
SYS_3V3 on PWR (split plane): 58.164,21.422 58.164,1.169 23.624,1.169 23.624,23.2 26.076,25.652 53.934,25.652
VLED_5V on PWR (split plane): 100.304,1.169 60.2,1.169 60.2,21.844 60.191,21.977 60.165,22.108 60.123,22.234 60.064,22.353 59.99,22.464 59.902,22.564 55.076,27.39 54.976,27.478 54.865,27.552 54.746,27.611 54.62,27.653 54.489,27.679 54.356,27.688 25.654,27.688 25.521,27.679 25.39,27.653 25.264,27.611 25.145,27.552 25.034,27.478 24.934,27.39 21.886,24.342 21.798,24.242 21.724,24.131 21.665,24.012 21.623,23.886 21.597,23.755 21.588,23.622 21.588,1.169 7.646,1.169 7.646,79.857 100.304,79.857

## Other copper
PWR (plane layer: these items are gaps in the copper):
  lines w2.032: 22.606,1.143 22.606,23.622 25.654,26.67 54.356,26.67 59.182,21.844 59.182,1.143

## Silkscreen, mask and mechanical layers (free items; w line width, h text height)
Top Overlay:
  circle w0.6: c34.405,20.047 r0.3
  circle w0.25: c35.405,22.097 r0.125
  lines w0.2: 24.305,15.24 35.405,15.24 35.405,20.828 24.305,20.828 24.305,15.24
Mechanical 13:
  circle w0.1: c34.505,20.297 r0.5
  lines w0.1: 24.305,14.997 24.305,21.197 35.405,21.197 35.405,14.997 24.305,14.997
Mechanical 15:
  lines w0.05: 24.055,13.022 24.055,23.172 35.655,23.172 35.655,13.022 24.055,13.022
  lines w0.1: 29.355,18.097 30.355,18.097 ; 29.855,17.597 29.855,18.597